# Altium PCB Microneedle_Patch - Copy.PcbDoc
Units mil, origin at the board's own origin, x right, y up, seen from the top; angles counter-clockwise.
Board outline 1133.86 x 3661.42 mil, 2 copper layers (Top, Bottom), stack 5.394 mil thick; 33 components, 33 nets, 708 pads, 16 vias.
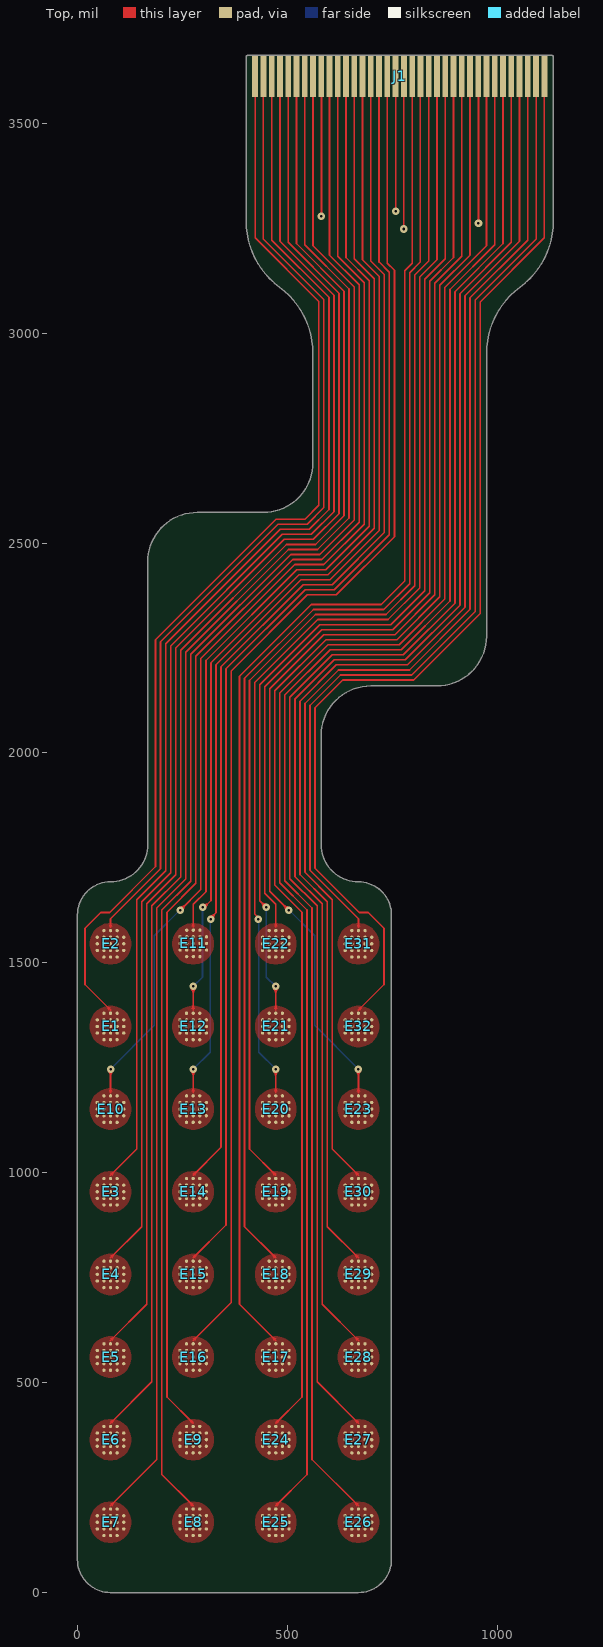
[diagram p0: Top view]
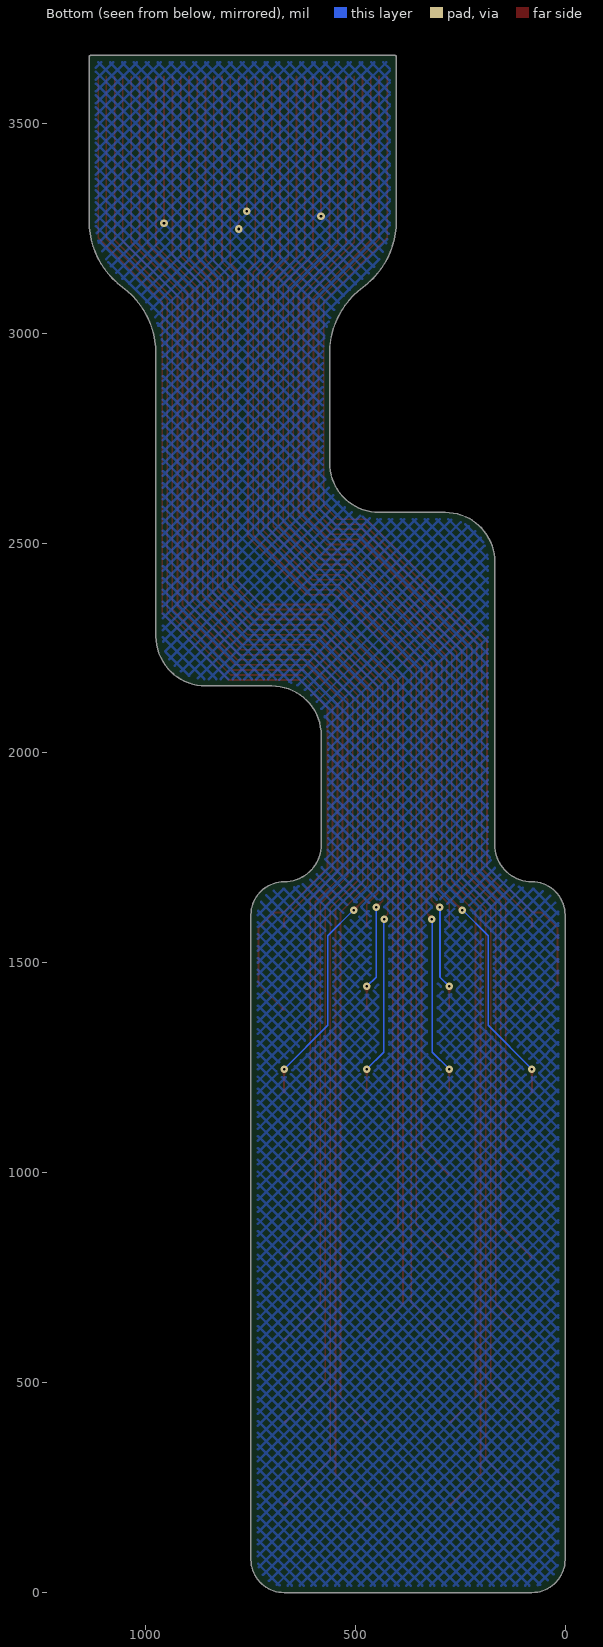
[diagram p1: Bottom view, seen from below]
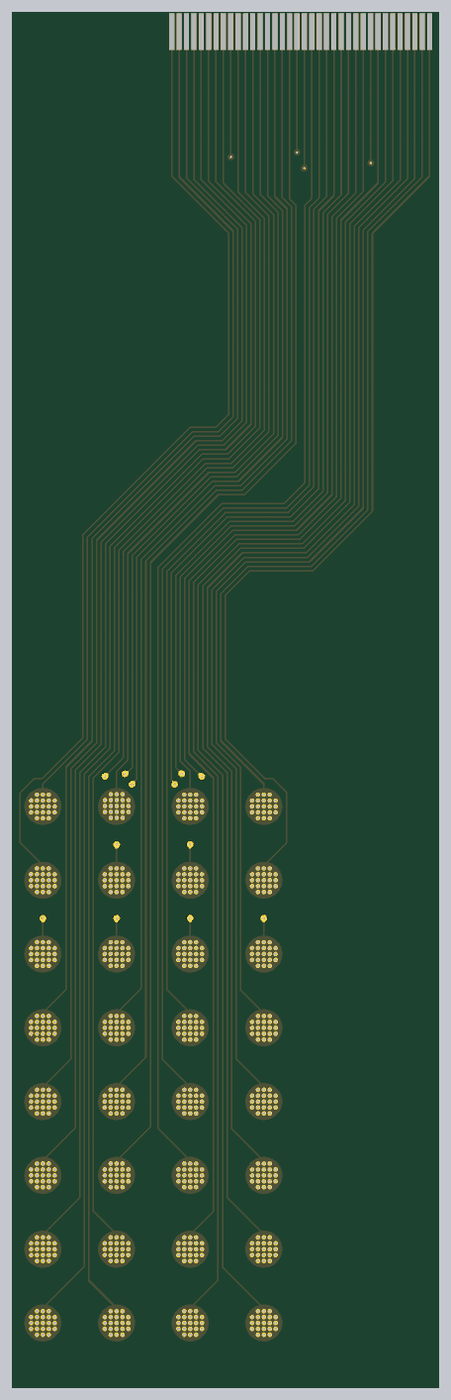
[diagram p2: 3D render of the assembled board from above, using the file's embedded part models]

## Layer stack, top to bottom
Board Layer Stack Top Coverlay: solder mask 0.9843, Polymide, Dk 3.4
Adhesive 3: prepreg 0.9843, Adhesive, Dk 3.3
Top: signal copper 0.7087
Dielectric 1: core 0.5118, Composite dielectric, Dk 3.3
Dielectric 3: core 0.9843, Polymide, Dk 3.4
Dielectric 2: core 0.5118, Composite dielectric, Dk 3.3
Bottom: signal copper 0.7087
Adhesive 2: prepreg 0.9843, Adhesive, Dk 3.3
Board Layer Stack Bottom Coverlay: solder mask 0.9843, Polymide, Dk 3.4

## Board outline
78.74,0 cw(c78.74,78.74) 0,78.74 0,1614.17 cw(c78.74,1614.17) 78.74,1692.91 ccw(c78.74,1781.5) 167.32,1781.5 167.32,2454.98 cw(c285.43,2454.98) 285.43,2573.09 442.91,2573.09 ccw(c442.91,2691.2) 561.02,2691.2 561.02,2951.29 ccw(c364.17,2951.29) 481.3,3109.5 cw(c598.43,3267.72) 401.57,3267.72 401.57,3657.48 cw(c405.51,3657.48) 405.51,3661.42 1129.92,3661.42 cw(c1129.92,3657.48) 1133.86,3657.48 1133.86,3267.72 cw(c937.01,3267.72) 1054.13,3109.5 ccw(c1171.26,2951.29) 974.41,2951.29 974.41,2277.81 cw(c856.3,2277.81) 856.3,2159.7 698.82,2159.7 ccw(c698.82,2041.59) 580.71,2041.59 580.71,1781.5 ccw(c669.29,1781.5) 669.29,1692.91 cw(c669.29,1614.17) 748.03,1614.17 748.03,78.74 cw(c669.29,78.74) 669.29,0

## Design rules (kind name [scope] priority, off if disabled: settings)
BoardOutlineClearance ZIF_BoardEdge [InPadClass('ZIF_Pads')] p1: gap=12 ignorepadtopadclearanceinfootprint=FALSE except(0: SMDPad-OutlineEdge)
BoardOutlineClearance [All] p2: gap=12 ignorepadtopadclearanceinfootprint=FALSE
Clearance [All] p1: gap=8 ignorepadtopadclearanceinfootprint=TRUE except(5: Arc-SMDPad Track-SMDPad SMDPad-SMDPad)
ComponentClearance [All] p1: gap=4 collisioncheckmode=3 verticalgap=4 showdistances=FALSE
HoleSize [All] p1: absolutevalues=TRUE maxlimit=1000 minlimit=4 maxpercent=80.000 minpercent=20.000
HoleToHoleClearance [All] p1: gap=10 allowstackedmicrovias=FALSE
MinimumSolderMaskSliver [All] p1: minsoldermaskwidth=3.94
PlaneClearance [All] p1: clearance=6
PlaneConnect [All] p1: pad.planeconnectstyle=Relief pad.reliefexpansion=20 pad.reliefentries=4 pad.reliefconductorwidth=10 pad.reliefairgap=10 via.planeconnectstyle=Direct via.reliefexpansion=20 via.reliefentries=4 via.reliefconductorwidth=10 via.reliefairgap=10
PolygonConnect [All] p1: thpad.connectstyle=Relief thpad.reliefconductorwidth=10 thpad.reliefentries=4 thpad.polygonreliefangle="90 Angle" thpad.airgapwidth=10 smdpad.connectstyle=Direct smdpad.reliefconductorwidth=10 smdpad.reliefentries=4 smdpad.polygonreliefangle="90 Angle" smdpad.airgapwidth=10 via.connectstyle=Direct via.reliefconductorwidth=10 via.reliefentries=4 via.polygonreliefangle="90 Angle" via.airgapwidth=10
RoutingVias [All] p1: holewidth=6 width=18 viastyle="Through Hole" minholewidth=6 minwidth=18 maxholewidth=6 maxwidth=18
SilkToSilkClearance [All] p1: silktosilkclearance=4
SilkToSolderMaskClearance [IsPad] p1: minsilkscreentomaskgap=2 clearancetoexposedcopper=FALSE
SolderMaskExpansion [All] p1: expansion=2 istentingtop=FALSE
SupplyNets "Schematic Supply Nets" [InNet('GND')] p1: voltage=0.000
Width [All] p1: maxlimit=4 minlimit=4 preferedwidth=4 minimp=50.000000 maximp=50.000000 favimp=50.000000
22 further rules are at their usual default settings.

## Classes and differential pairs
pad class ZIF_Pads: J1-1 J1-2 J1-3 J1-4 J1-5 J1-6 J1-7 J1-8 J1-9 J1-10 J1-11 J1-12 J1-13 J1-14 J1-15 J1-16 J1-17 J1-18 J1-19 J1-20 J1-21 J1-22 J1-23 J1-24 J1-25 J1-26 J1-27 J1-28 J1-29 J1-30 J1-31 J1-32 J1-33 J1-34 J1-35 J1-36
component class Main: E1 E2 E4 E6 E27

## Components (designator, comment, footprint, x,y, rotation, side; value= is the part's Value field where it differs from the comment)
E1 "2.5 mm" PCBComponent_1 78.74,1348.43 r0 top
E2 "2.5 mm" PCBComponent_1 78.74,1545.28 r0 top
E3 "2.5 mm" PCBComponent_1 78.74,954.72 r0 top
E4 "2.5 mm" PCBComponent_1 78.74,757.87 r0 top
E5 "2.5 mm" PCBComponent_1 78.74,561.02 r0 top
E6 "2.5 mm" PCBComponent_1 78.74,364.17 r0 top
E7 "2.5 mm" PCBComponent_1 78.74,167.32 r0 top
E8 "2.5 mm" PCBComponent_1 275.59,167.32 r0 top
E9 "2.5 mm" PCBComponent_1 275.59,364.17 r0 top
E10 "2.5 mm" PCBComponent_1 78.74,1151.57 r0 top
E11 "2.5 mm" PCBComponent_1 275.98,1546.26 r0 top
E12 "2.5 mm" PCBComponent_1 275.59,1348.43 r0 top
E13 "2.5 mm" PCBComponent_1 275.59,1151.57 r0 top
E14 "2.5 mm" PCBComponent_1 275.59,954.72 r0 top
E15 "2.5 mm" PCBComponent_1 275.59,757.87 r0 top
E16 "2.5 mm" PCBComponent_1 275.59,561.02 r0 top
E17 "2.5 mm" PCBComponent_1 472.44,561.02 r0 top
E18 "2.5 mm" PCBComponent_1 472.44,757.87 r0 top
E19 "2.5 mm" PCBComponent_1 472.44,954.72 r0 top
E20 "2.5 mm" PCBComponent_1 472.44,1151.57 r0 top
E21 "2.5 mm" PCBComponent_1 472.44,1348.43 r0 top
E22 "2.5 mm" PCBComponent_1 472.44,1545.28 r0 top
E23 "2.5 mm" PCBComponent_1 669.29,1151.57 r0 top
E24 "2.5 mm" PCBComponent_1 472.44,364.17 r0 top
E25 "2.5 mm" PCBComponent_1 472.44,167.32 r0 top
E26 "2.5 mm" PCBComponent_1 669.29,167.32 r0 top
E27 "2.5 mm" PCBComponent_1 669.29,364.17 r0 top
E28 "2.5 mm" PCBComponent_1 669.29,561.02 r0 top
E29 "2.5 mm" PCBComponent_1 669.29,757.87 r0 top
E30 "2.5 mm" PCBComponent_1 669.29,954.72 r0 top
E31 "2.5 mm" PCBComponent_1 669.29,1545.28 r0 top
E32 "2.5 mm" PCBComponent_1 669.29,1348.43 r0 top
J1 "XF2M-3615-1A" CONN_FPC_2X18_0MM5 767.72,3612.2 r0 top

## Footprints (in the part's own frame and the unit in brackets; to place one, negate y for a bottom-side part, rotate by r counter-clockwise, add the part's x,y. Pads: shape width x height; smd on the part's side, far side on the other; paste and mask are expansions set on the pad)
CONN_FPC_2X18_0MM5 [mm] "Compatible with XF2M-3615-1A / 0.5 mm pitch, 2X18"
  rect 0.35x2.5 smd mask+0: 1(-8.75,0) 2(-8.25,0) 3(-7.75,0) 4(-7.25,0) 5(-6.75,0) 6(-6.25,0) 7(-5.75,0) 8(-5.25,0) 9(-4.75,0) 10(-4.25,0) 11(-3.75,0) 12(-3.25,0) 13(-2.75,0) 14(-2.25,0) 15(-1.75,0) 16(-1.25,0) 17(-0.75,0) 18(-0.25,0) 19(0.25,0) 20(0.75,0) 21(1.25,0) 22(1.75,0) 23(2.25,0) 24(2.75,0) 25(3.25,0) 26(3.75,0) 27(4.25,0) 28(4.75,0) 29(5.25,0) 30(5.75,0) 31(6.25,0) 32(6.75,0) 33(7.25,0) 34(7.75,0) 35(8.25,0) 36(8.75,0)
PCBComponent_1 [mm]
  round 0.2 smd paste+0 mask+0.05: 1(-0.8,-0.4) 1(-0.8,0) 1(-0.8,0.4) 1(-0.4,-0.8) 1(-0.4,-0.4) 1(-0.4,0) 1(-0.4,0.4) 1(-0.4,0.8) 1(0,-0.8) 1(0,-0.4) 1(0,0) 1(0,0.4) 1(0,0.8) 1(0.4,-0.8) 1(0.4,-0.4) 1(0.4,0) 1(0.4,0.4) 1(0.4,0.8) 1(0.8,-0.4) 1(0.8,0) 1(0.8,0.4)
  body extent -0.82,-0.82 0.82,0.82, height 0.4

## Part data
E1 E2 E3 E4 E5 E6 E7 E8 E9 E10 E11 E12 E13 E14 E15 E16 E17 E18 E19 E20 E21 E22 E23 E24 E25 E26 E27 E28 E29 E30 E31 E32: library part SENSE_UNEEDLE, "Microneedle electrode - 2.5 mm diameter"
J1: library part CONN_FPC_2X18_0MM5, "FPC Connector - FPC Side. 0.5 mm pitch / Compatible with XF2M-3615-1A", GRAMS Lib Spec=2.7

## Via types
v1: diameter 18, hole 6, Top to Bottom, 16 vias

## Nets (pads, with @x,y where several pads share a name; then routed paths per layer and width w, separated by ;. In a path a pad name is that pad's centre, name@x,y a point inside that pad or via, vN(x,y) a via of type N, cw(c..) or ccw(c..) an arc to the next point about the centre after c; other vN are vias at no path point)
GND: J1.9 J1.18 J1.19 J1.28 | length 1371.4
  Top w4: J1.9 581.26,3611.65 v1(581.26,3278) ; v1(757.87,3290) J1.18 ; v1(777.26,3248) 777.26,3611.91 J1.19 ; J1.28 955.26,3611.67 v1(955.26,3262)
Input1: E1.1 J1.1 | length 2596.1
  Top w4: 78.74,1387.8 18,1448.54 18,1582.54 55.43,1619.97 76.66,1619.97 186.02,1729.32 186.02,2269.76 472.93,2556.68 542.08,2556.68 575.02,2589.62 575.02,3075.15 423.23,3226.94 J1.1
Input2: E2.1 J1.2 | length 2338.3
  Top w4: 78.74,1584.65 78.74,1605.08 198.02,1724.35 198.02,2249.13 198.02,2264.79 477.9,2544.68 547.05,2544.68 587.02,2584.65 587.02,3080.12 442.91,3224.23 J1.2
Input3: E3.1 J1.3 | length 2930.6
  Top w4: 78.74,994.09 141.17,1056.52 141.17,1650.53 210.02,1719.38 210.02,2259.82 482.87,2532.68 552.02,2532.68 599.02,2579.68 599.02,3085.09 462.6,3221.52 J1.3
Input4: E4.1 J1.4 | length 3129.3
  Top w4: 78.74,797.24 153.17,871.67 153.17,1645.56 222.02,1714.41 222.02,2254.85 487.84,2520.68 556.99,2520.68 611.02,2574.71 611.02,3090.06 482.28,3218.8 J1.4
Input5: E5.1 J1.5 | length 3327.9
  Top w4: 78.74,600.39 165.17,686.82 165.17,1640.59 234.02,1709.44 234.02,2249.88 492.81,2508.68 561.96,2508.68 623.02,2569.74 623.02,3095.03 501.97,3216.09 J1.5
Input6: E6.1 J1.6 | length 3526.5
  Top w4: 78.74,403.54 177.17,501.97 177.17,1635.62 246.02,1704.47 246.02,2244.91 497.78,2496.68 566.93,2496.68 635.02,2564.77 635.02,3100 521.65,3213.37 J1.6
Input7: E7.1 J1.7 | length 3725.2
  Top w4: 78.74,206.69 189.17,317.12 189.17,1630.65 258.02,1699.5 258.02,2239.94 502.75,2484.68 571.9,2484.68 647.02,2559.8 647.02,3104.97 541.34,3210.66 J1.7
Input8: E8.1 J1.8 | length 3707.1
  Top w4: 275.59,206.69 201.17,281.12 201.17,1625.68 270.02,1694.53 270.02,2234.97 507.72,2472.68 576.87,2472.68 659.02,2554.83 659.02,3109.94 561.02,3207.94 J1.8
Input9: E9.1 J1.10 | length 3493.9
  Top w4: 275.59,403.54 213.17,465.97 213.17,1620.71 282.02,1689.56 282.02,2230 512.69,2460.68 581.84,2460.68 671.02,2549.86 671.02,3114.91 600.39,3185.54 J1.10
Input10: E10.1 J1.11 | length 2738.9
  Top w4: 78.74,1190.94 78.74,1246.74 v1(79,1247) ; v1(244.61,1625.29) 294.02,1674.69 294.02,2225.03 517.66,2448.68 586.81,2448.68 683.02,2544.89 683.02,3119.88 620.08,3182.83 J1.11
  Bottom w4: v1(79,1247) 183,1351 183,1564.46 244.22,1625.68 v1(244.61,1625.29)
Input11: E11.1 J1.12 | length 2264.7
  Top w4: 275.59,1584.65 275.59,1639.29 306.02,1669.72 306.02,2220.06 522.63,2436.68 591.78,2436.68 695.02,2539.92 695.02,3124.85 639.76,3180.11 J1.12
Input12: E12.1 J1.13 | length 2465.4
  Top w4: 275.59,1387.8 275.59,1443.59 v1(275.85,1443.85) ; v1(298,1632) 301.6,1632 318.02,1648.42 318.02,2215.09 527.6,2424.68 596.75,2424.68 707.02,2534.95 707.02,3129.83 659.45,3177.4 J1.13
  Bottom w4: v1(275.85,1443.85) 298,1466 v1(298,1632)
Input13: E13.1 J1.14 | length 2662
  Top w4: 275.59,1190.94 275.59,1246.74 v1(275.85,1247) ; v1(317,1604) 317,1606.21 330.02,1619.23 330.02,2210.12 532.57,2412.68 601.72,2412.68 719.02,2529.98 719.02,3134.8 679.13,3174.69 J1.14
  Bottom w4: v1(275.85,1247) 316,1287.15 316,1603 v1(317,1604)
Input14: E14.1 J1.15 | length 2860.6
  Top w4: 275.59,994.09 342.02,1060.52 342.02,2205.15 537.55,2400.68 606.69,2400.68 731.02,2525.01 731.02,3139.77 698.82,3171.97 J1.15
Input15: E15.1 J1.16 | length 3059.2
  Top w4: 275.59,797.24 354.02,875.67 354.02,2200.18 542.52,2388.68 611.66,2388.68 743.02,2520.03 743.02,3144.74 718.5,3169.26 J1.16
Input16: E16.1 J1.17 | length 3257.9
  Top w4: 275.59,600.39 366.02,690.82 366.02,2195.21 547.49,2376.68 616.64,2376.68 755.02,2515.06 755.02,3149.71 738.19,3166.54 J1.17
Input17: E17.1 J1.20 | length 3315.3
  Top w4: 472.44,600.39 386,686.83 386,2182.56 557.14,2353.7 723.36,2353.7 779.26,2409.59 779.26,3148.56 797.24,3166.54 J1.20
Input18: E18.1 J1.21 | length 3117.7
  Top w4: 472.44,797.24 398,871.69 398,2177.59 562.11,2341.7 729.99,2341.7 791.26,2402.97 791.26,3143.59 816.93,3169.26 J1.21
Input19: E19.1 J1.22 | length 2919
  Top w4: 472.44,994.09 410,1056.54 410,2172.62 567.08,2329.7 734.96,2329.7 803.26,2398 803.26,3138.62 836.61,3171.97 J1.22
Input20: E20.1 J1.23 | length 2720
  Top w4: v1(431.03,1604) 431.03,1607.15 422,1616.18 422,2167.65 572.05,2317.7 739.93,2317.7 815.26,2393.03 815.26,3133.65 856.3,3174.69 J1.23 ; 472.44,1190.94 v1@472.44,1246.74
  Bottom w4: v1(431.03,1604) 432.03,1603 432.03,1287.15 v1(472.18,1247)
Input21: E21.1 J1.24 | length 2522.2
  Top w4: v1(450.03,1632) 434,1648.03 434,2162.68 577.02,2305.7 746.34,2305.7 827.26,2386.62 827.26,3128.68 875.98,3177.4 J1.24 ; 472.44,1387.8 v1@472.44,1443.59
  Bottom w4: v1(450.03,1632) 450.03,1466 v1(472.18,1443.85)
Input22: E22.1 J1.25 | length 2324
  Top w4: 472.44,1584.65 472.44,1639.29 446,1665.73 446,2157.71 581.99,2293.7 751.31,2293.7 839.26,2381.65 839.26,3123.71 895.67,3180.11 J1.25
Input23: E23.1 J1.26 | length 2797.8
  Top w4: v1(503.42,1625.29) 458,1670.7 458,2152.73 586.96,2281.7 756.28,2281.7 851.26,2376.68 851.26,3118.73 915.35,3182.83 J1.26 ; 669.29,1190.94 v1@669.29,1246.74
  Bottom w4: v1(503.42,1625.29) 503.81,1625.68 565.03,1564.46 565.03,1351 v1(669.03,1247)
Input24: E24.1 J1.27 | length 3553.2
  Top w4: 472.44,403.54 534.87,465.97 534.87,1620.71 470,1685.57 470,2147.76 591.94,2269.7 761.25,2269.7 863.26,2371.71 863.26,3113.76 935.04,3185.54 J1.27
Input25: E25.1 J1.29 | length 3766.4
  Top w4: 472.44,206.69 546.87,281.12 546.87,1625.68 482,1690.55 482,2142.79 596.91,2257.7 766.22,2257.7 875.26,2366.74 875.26,3108.79 974.41,3207.94 J1.29
Input26: E26.1 J1.30 | length 3784.5
  Top w4: 669.29,206.69 558.87,317.12 558.87,1630.65 494,1695.52 494,2137.82 601.88,2245.7 771.19,2245.7 887.26,2361.76 887.26,3103.82 994.09,3210.66 J1.30
Input27: E27.1 J1.31 | length 3585.8
  Top w4: 669.29,403.54 570.87,501.97 570.87,1635.62 506,1700.49 506,2132.85 606.85,2233.7 776.16,2233.7 899.26,2356.79 899.26,3098.85 1013.78,3213.37 J1.31
Input28: E28.1 J1.32 | length 3387.2
  Top w4: 669.29,600.39 582.87,686.82 582.87,1640.59 518,1705.46 518,2127.88 611.82,2221.7 781.14,2221.7 911.26,2351.82 911.26,3093.88 1033.46,3216.09 J1.32
Input29: E29.1 J1.33 | length 3188.5
  Top w4: 669.29,797.24 594.87,871.67 594.87,1645.56 530,1710.43 530,2122.91 616.79,2209.7 786.11,2209.7 923.26,2346.85 923.26,3088.91 1053.15,3218.8 J1.33
Input30: E30.1 J1.34 | length 2989.9
  Top w4: 669.29,994.09 606.87,1056.52 606.87,1650.53 542,1715.4 542,2117.94 621.76,2197.7 791.08,2197.7 935.26,2341.88 935.26,3083.94 1072.83,3221.52 J1.34
Input31: E31.1 J1.35 | length 2397.6
  Top w4: 669.29,1584.65 669.29,1605.08 554,1720.37 554,2112.97 626.73,2185.7 796.05,2185.7 947.26,2336.91 947.26,3078.97 1092.52,3224.23 J1.35
Input32: E32.1 J1.36 | length 2655.4
  Top w4: 669.29,1387.8 730.03,1448.54 730.03,1582.54 692.6,1619.97 671.37,1619.97 566,1725.34 566,2108 631.7,2173.7 801.02,2173.7 959.26,2331.94 959.26,3074 1112.2,3226.94 J1.36

## Polygon pours and split planes (outlines as drawn)
Input31 on Top "Electrode31" (solid, pour order 5): 669.29,1594.49 cw(c669.29,1545.28) 718.5,1545.28 cw(c669.29,1545.28) 669.29,1496.06 cw(c669.29,1545.28) 620.08,1545.28 cw(c669.29,1545.28)
Input18 on Top "Electrode18" (solid, pour order 27): 472.44,807.09 cw(c472.44,757.87) 521.65,757.87 cw(c472.44,757.87) 472.44,708.66 cw(c472.44,757.87) 423.23,757.87 cw(c472.44,757.87)
Input26 on Top "Electrode26" (solid, pour order 28): 669.29,216.54 cw(c669.29,167.32) 718.5,167.32 cw(c669.29,167.32) 669.29,118.11 cw(c669.29,167.32) 620.08,167.32 cw(c669.29,167.32)
Input32 on Top "Electrode32" (solid, pour order 0): 669.29,1397.64 cw(c669.29,1348.43) 718.5,1348.43 cw(c669.29,1348.43) 669.29,1299.21 cw(c669.29,1348.43) 620.08,1348.43 cw(c669.29,1348.43)
Input16 on Top "Electrode16" (solid, pour order 31): 275.59,610.24 cw(c275.59,561.02) 324.8,561.02 cw(c275.59,561.02) 275.59,511.81 cw(c275.59,561.02) 226.38,561.02 cw(c275.59,561.02)
Input14 on Top "Electrode14" (solid, pour order 23): 275.59,1003.94 cw(c275.59,954.72) 324.8,954.72 cw(c275.59,954.72) 275.59,905.51 cw(c275.59,954.72) 226.38,954.72 cw(c275.59,954.72)
Input25 on Top "Electrode25" (solid, pour order 29): 472.44,216.54 cw(c472.44,167.32) 521.65,167.32 cw(c472.44,167.32) 472.44,118.11 cw(c472.44,167.32) 423.23,167.32 cw(c472.44,167.32)
Input1 on Top "Electrode1" (solid, pour order 4): 78.74,1397.64 cw(c78.74,1348.43) 127.95,1348.43 cw(c78.74,1348.43) 78.74,1299.21 cw(c78.74,1348.43) 29.53,1348.43 cw(c78.74,1348.43)
Input19 on Top "Electrode19" (solid, pour order 22): 472.44,1003.94 cw(c472.44,954.72) 521.65,954.72 cw(c472.44,954.72) 472.44,905.51 cw(c472.44,954.72) 423.23,954.72 cw(c472.44,954.72)
Input12 on Top "Electrode12" (solid, pour order 15): 275.59,1397.64 cw(c275.59,1348.43) 324.8,1348.43 cw(c275.59,1348.43) 275.59,1299.21 cw(c275.59,1348.43) 226.38,1348.43 cw(c275.59,1348.43)
Input11 on Top "Electrode11" (solid, pour order 10): 275.59,1594.49 cw(c275.59,1545.28) 324.8,1545.28 cw(c275.59,1545.28) 275.59,1496.06 cw(c275.59,1545.28) 226.38,1545.28 cw(c275.59,1545.28)
Input9 on Top "Electrode9" (solid, pour order 3): 275.59,413.39 cw(c275.59,364.17) 324.8,364.17 cw(c275.59,364.17) 275.59,314.96 cw(c275.59,364.17) 226.38,364.17 cw(c275.59,364.17)
Input3 on Top "Electrode3" (solid, pour order 9): 78.74,1003.94 cw(c78.74,954.72) 127.95,954.72 cw(c78.74,954.72) 78.74,905.51 cw(c78.74,954.72) 29.53,954.72 cw(c78.74,954.72)
Input4 on Top "Electrode4" (solid, pour order 16): 78.74,807.09 cw(c78.74,757.87) 127.95,757.87 cw(c78.74,757.87) 78.74,708.66 cw(c78.74,757.87) 29.53,757.87 cw(c78.74,757.87)
Input5 on Top "Electrode5" (solid, pour order 17): 78.74,610.24 cw(c78.74,561.02) 127.95,561.02 cw(c78.74,561.02) 78.74,511.81 cw(c78.74,561.02) 29.53,561.02 cw(c78.74,561.02)
Input6 on Top "Electrode6" (solid, pour order 24): 78.74,413.39 cw(c78.74,364.17) 127.95,364.17 cw(c78.74,364.17) 78.74,314.96 cw(c78.74,364.17) 29.53,364.17 cw(c78.74,364.17)
Input7 on Top "Electrode7" (solid, pour order 25): 78.74,216.54 cw(c78.74,167.32) 127.95,167.32 cw(c78.74,167.32) 78.74,118.11 cw(c78.74,167.32) 29.53,167.32 cw(c78.74,167.32)
Input8 on Top "Electrode8" (solid, pour order 32): 275.59,216.54 cw(c275.59,167.32) 324.8,167.32 cw(c275.59,167.32) 275.59,118.11 cw(c275.59,167.32) 226.38,167.32 cw(c275.59,167.32)
Input15 on Top "Electrode15" (solid, pour order 26): 275.59,807.09 cw(c275.59,757.87) 324.8,757.87 cw(c275.59,757.87) 275.59,708.66 cw(c275.59,757.87) 226.38,757.87 cw(c275.59,757.87)
Input2 on Top "Electrode2" (solid, pour order 8): 78.74,1594.49 cw(c78.74,1545.28) 127.95,1545.28 cw(c78.74,1545.28) 78.74,1496.06 cw(c78.74,1545.28) 29.53,1545.28 cw(c78.74,1545.28)
Input20 on Top "Electrode20" (solid, pour order 14): 472.44,1200.79 cw(c472.44,1151.57) 521.65,1151.57 cw(c472.44,1151.57) 472.44,1102.36 cw(c472.44,1151.57) 423.23,1151.57 cw(c472.44,1151.57)
Input21 on Top "Electrode21" (solid, pour order 19): 472.44,1397.64 cw(c472.44,1348.43) 521.65,1348.43 cw(c472.44,1348.43) 472.44,1299.21 cw(c472.44,1348.43) 423.23,1348.43 cw(c472.44,1348.43)
Input22 on Top "Electrode22" (solid, pour order 11): 472.44,1594.49 cw(c472.44,1545.28) 521.65,1545.28 cw(c472.44,1545.28) 472.44,1496.06 cw(c472.44,1545.28) 423.23,1545.28 cw(c472.44,1545.28)
Input23 on Top "Electrode23" (solid, pour order 6): 669.29,1200.79 cw(c669.29,1151.57) 718.5,1151.57 cw(c669.29,1151.57) 669.29,1102.36 cw(c669.29,1151.57) 620.08,1151.57 cw(c669.29,1151.57)
Input13 on Top "Electrode13" (solid, pour order 18): 275.59,1200.79 cw(c275.59,1151.57) 324.8,1151.57 cw(c275.59,1151.57) 275.59,1102.36 cw(c275.59,1151.57) 226.38,1151.57 cw(c275.59,1151.57)
Input10 on Top "Electrode10" (solid, pour order 7): 78.74,1200.79 cw(c78.74,1151.57) 127.95,1151.57 cw(c78.74,1151.57) 78.74,1102.36 cw(c78.74,1151.57) 29.53,1151.57 cw(c78.74,1151.57)
Input29 on Top "Electrode29" (solid, pour order 13): 669.29,807.09 cw(c669.29,757.87) 718.5,757.87 cw(c669.29,757.87) 669.29,708.66 cw(c669.29,757.87) 620.08,757.87 cw(c669.29,757.87)
Input30 on Top "Electrode30" (solid, pour order 12): 669.29,1003.94 cw(c669.29,954.72) 718.5,954.72 cw(c669.29,954.72) 669.29,905.51 cw(c669.29,954.72) 620.08,954.72 cw(c669.29,954.72)
Input24 on Top "Electrode24" (solid, pour order 2): 472.44,413.39 cw(c472.44,364.17) 521.65,364.17 cw(c472.44,364.17) 472.44,314.96 cw(c472.44,364.17) 423.23,364.17 cw(c472.44,364.17)
Input28 on Top "Electrode28" (solid, pour order 20): 669.29,610.24 cw(c669.29,561.02) 718.5,561.02 cw(c669.29,561.02) 669.29,511.81 cw(c669.29,561.02) 620.08,561.02 cw(c669.29,561.02)
Input27 on Top "Electrode27" (solid, pour order 21): 669.29,413.39 cw(c669.29,364.17) 718.5,364.17 cw(c669.29,364.17) 669.29,314.96 cw(c669.29,364.17) 620.08,364.17 cw(c669.29,364.17)
Input17 on Top "Electrode17" (solid, pour order 30): 472.44,610.24 cw(c472.44,561.02) 521.65,561.02 cw(c472.44,561.02) 472.44,511.81 cw(c472.44,561.02) 423.23,561.02 cw(c472.44,561.02)
no net on Layer0 "Default Coverlay 1 Top" (split plane): 176 vertices, not listed, extent 0,0 1212.6,3661.42
no net on Layer0 "Default Coverlay 1 Bottom" (split plane): 176 vertices, not listed, extent 0,0 1212.6,3661.42
GND on Bottom "GND_BOT" (hatched 45Degree grid 20 track 6, remove dead copper, pour order 33): 324.8,3692 1234,3692 1234,3150 1090,3006 1090,2252 992,2154 660,2154 582,2076 582,1744 620,1706 706,1706 744,1668 744,50 696,2 -4,2 -4,370 4,378 4,1666 170,1832 170,2524 222,2576 400.8,2576 531.5,2706.69 531.5,2980.82 324.8,3187.51

## Silkscreen, mask and mechanical layers (free items; w line width, h text height)
Board Outline:
  circle w7.87: c374.02,0 r1.97
  lines w7.87: 0,108.27 0,0 ; 118.11,0 0,0 ; 0,0 0,0 ; 0,78.74 ccw(c78.74,78.74) 78.74,0 669.29,0 ccw(c669.29,78.74) 748.03,78.74 748.03,1614.17 ccw(c669.29,1614.17) 669.29,1692.91 cw(c669.29,1781.5) 580.71,1781.5 580.71,2041.59 cw(c698.82,2041.59) 698.82,2159.7 856.3,2159.7 ccw(c856.3,2277.81) 974.41,2277.81 974.41,2951.29 cw(c1171.26,2951.29) 1054.13,3109.5 ccw(c937.01,3267.72) 1133.86,3267.72 1133.86,3657.48 ccw(c1129.92,3657.48) 1129.92,3661.42 405.51,3661.42 ccw(c405.51,3657.48) 401.57,3657.48 401.57,3267.72 ccw(c598.43,3267.72) 481.3,3109.5 cw(c364.17,2951.29) 561.02,2951.29 561.02,2691.2 cw(c442.91,2691.2) 442.91,2573.09 285.43,2573.09 ccw(c285.43,2454.98) 167.32,2454.98 167.32,1781.5 cw(c78.74,1781.5) 78.74,1692.91 ccw(c78.74,1614.17) 0,1614.17 0,78.74
Manufacturing Notes:
  lines w10: 1259.29,494.88 3909.29,494.88 3909.29,644.88 1259.29,644.88 1259.29,794.88 3909.29,794.88 3909.29,944.88 1259.29,944.88 1259.29,1094.88 3909.29,1094.88 3909.29,1244.88 1259.29,1244.88 1259.29,1394.88 3909.29,1394.88 3909.29,1544.88 1259.29,1544.88 1259.29,1694.88 3909.29,1694.88 3909.29,1744.88 ; 3609.29,344.88 3609.29,1994.88 ; 3609.29,2144.88 3609.29,1994.88 ; 3909.29,1844.88 1259.29,1844.88 1259.29,1994.88 ; 1259.29,1994.88 1809.29,1994.88 ; 1259.29,1994.88 1259.29,2144.88 3909.29,2144.88 3909.29,1994.88 ; 1259.29,1994.88 1259.29,344.88 3909.29,344.88 3909.29,1994.88 ; 1259.29,1994.88 3909.29,1994.88 ; 1809.29,1994.88 1809.29,2144.88 2309.29,2144.88 2309.29,1994.88 ; 1809.29,1994.88 1809.29,344.88 2309.29,344.88 2309.29,1994.88 ; 2309.29,1994.88 2709.29,1994.88 ; 2309.29,1994.88 2709.29,1994.88 ; 2709.29,1994.88 2709.29,2144.88 3259.29,2144.88 3259.29,1994.88 ; 2709.29,1994.88 2709.29,344.88 3259.29,344.88 3259.29,1994.88 ; 3259.29,1994.88 3609.29,1994.88 ; 3259.29,1994.88 3609.29,1994.88 ; 3609.29,1994.88 3909.29,1994.88
  text "STIFFFENER:" at 1275.48,3599.89 h40
  text "MATERIAL: POLYMIDE (PI)" at 1325.48,3499.89 h40
  text "SIDE: BOTTOM SIDE OF FPC" at 1325.48,3399.89 h40
  text "STIFFENER AREA: DEFINED BY \"STIFFENER\" MECHANICAL LAYER" at 1325.48,3299.89 h40
  text "STIFFENER SHALL COVER THE ENTIRE DEFINED AREA" at 1325.48,3199.89 h40
  text "ALIGN STIFFENER EDGES WITH THE DEFINED STIFFENER OUTLINE" at 1325.48,3099.89 h40
  text "FINAL FPC THICKNESS IN ZIF CONTACT REGION: 0.3 MM" at 1325.48,2999.89 h40
  text "Type" at 1419.29,2056.15 h60
  text "Material" at 1949.29,2056.15 h60
  text "Weight" at 2429.29,2056.15 h60
  text "Dk" at 3409.29,2056.15 h60
  text "Thickness" at 2849.29,2054.88 h60
  text "Df" at 3739.29,2054.27 h60
  text "Polymide" at 1959.29,1906.15 h60
  text "0.025 mm" at 2859.29,1895.55 h60
  text "0.015" at 3709.29,1895.55 h60
  text "Top Coverlay" at 1326.02,1894.88 h60
  text "3.4" at 3409.29,1894.88 h60
  text "0.025 mm" at 2859.29,1745.55 h60
  text "Adhesive" at 1326.02,1734.23 h60
  text "0.018 mm" at 2859.29,1595.55 h60
  text "Top Layer" at 1326.02,1594.88 h60
  text "0.5 oz" at 2409.29,1584.28 h60
  text "0.013 mm" at 2859.29,1445.55 h60
  text "Adhesive" at 1326.02,1434.23 h60
  text "0.025 mm" at 2859.29,1295.55 h60
  text "3.4" at 3409.29,1295.55 h60
  text "Polymide" at 1959.29,1294.22 h60
  text "0.015" at 3709.29,1294.88 h60
  text "Core" at 1326.02,1284.28 h60
  text "0.013 mm" at 2859.29,1145.55 h60
  text "Adhesive" at 1326.02,1134.23 h60
  text "0.5 oz" at 2421.26,1000 h60
  text "0.018 mm" at 2859.29,995.55 h60
  text "Bottom Layer" at 1326.02,994.88 h60
  text "0.025 mm" at 2859.29,845.55 h60
  text "Adhesive" at 1326.02,834.23 h60
  text "Polymide" at 1959.29,705.48 h60
  text "0.025 mm" at 2859.29,695.55 h60
  text "3.4" at 3409.29,695.55 h60
  text "Bottom Coverlay" at 1326.02,694.88 h60
  text "0.015" at 3709.29,694.88 h60
  text "0.025 mm" at 2859.29,556.81 h60
  text "Adhesive" at 1326.02,545.49 h60
  text "0.088 mm" at 2859.29,406.81 h60
  text "3.4" at 3409.29,406.81 h60
  text "0.015" at 3709.29,406.15 h60
  text "Polymide" at 1959.29,405.48 h60
  text "Bottom Stiffener" at 1326.02,395.55 h60
  text "Finished thickness (with stiffener): 0.30 mm nominal" at 1258.27,236.67 h60
  text "Finished thickness (without stiffener): 0.187 mm nominal" at 1262.2,169.74 h60
  text "Substrate Finish: ENEPIG" at 1262.2,96.46 h60
  text "Thickness of Immersion Gold: 4U\"" at 1259.84,24.78 h60
Board Shape:
  circle w7.87: c374.02,0 r1.97
  lines w7.87: 0,78.74 ccw(c78.74,78.74) 78.74,0 669.29,0 ccw(c669.29,78.74) 748.03,78.74 748.03,1614.17 ccw(c669.29,1614.17) 669.29,1692.91 cw(c669.29,1781.5) 580.71,1781.5 580.71,2041.59 cw(c698.82,2041.59) 698.82,2159.7 856.3,2159.7 ccw(c856.3,2277.81) 974.41,2277.81 974.41,2951.29 cw(c1171.26,2951.29) 1054.13,3109.5 ccw(c937.01,3267.72) 1133.86,3267.72 1133.86,3657.48 ccw(c1129.92,3657.48) 1129.92,3661.42 405.51,3661.42 ccw(c405.51,3657.48) 401.57,3657.48 401.57,3267.72 ccw(c598.43,3267.72) 481.3,3109.5 cw(c364.17,2951.29) 561.02,2951.29 561.02,2691.2 cw(c442.91,2691.2) 442.91,2573.09 285.43,2573.09 ccw(c285.43,2454.98) 167.32,2454.98 167.32,1781.5 cw(c78.74,1781.5) 78.74,1692.91 ccw(c78.74,1614.17) 0,1614.17 0,78.74
Stiffener:
  lines w7.87: 401.57,3484.25 1133.86,3484.25 1133.86,3661.42 401.57,3661.42 401.57,3484.25